# EAGLE board 555 timer board (EAGLE 9.5.0)
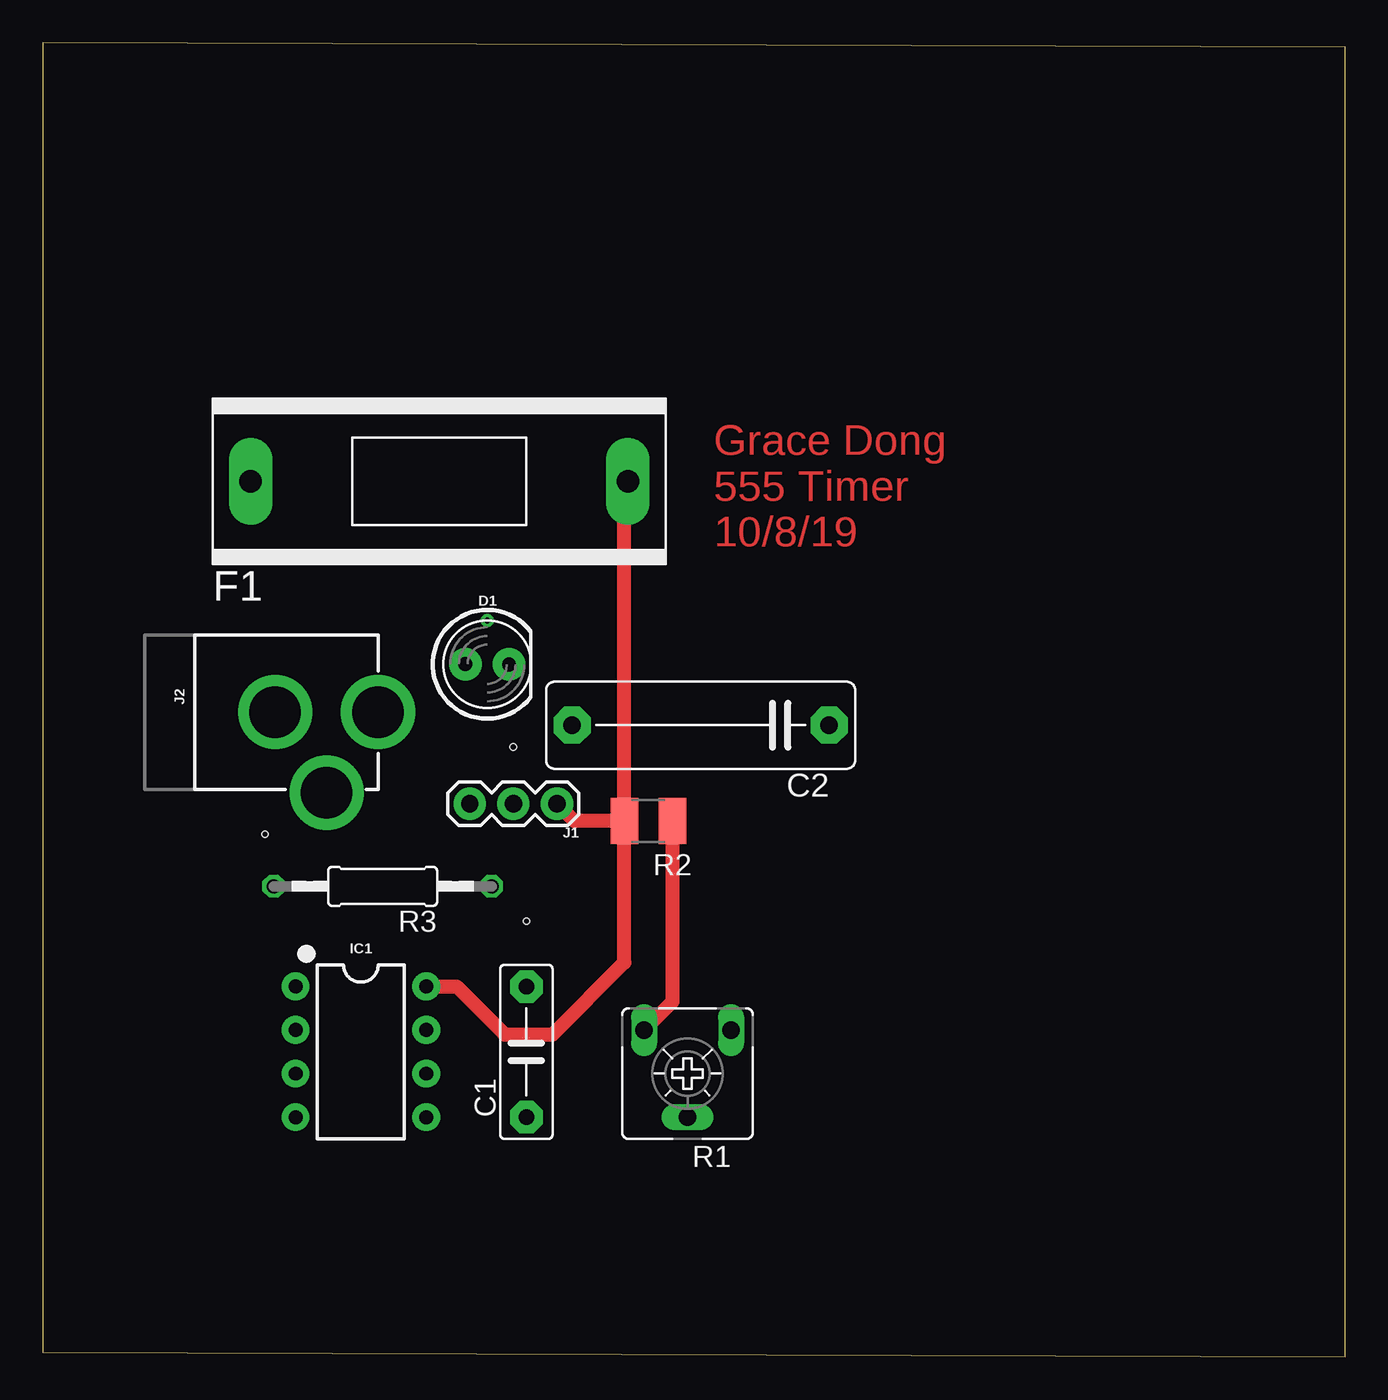
[diagram p0: board, top side]
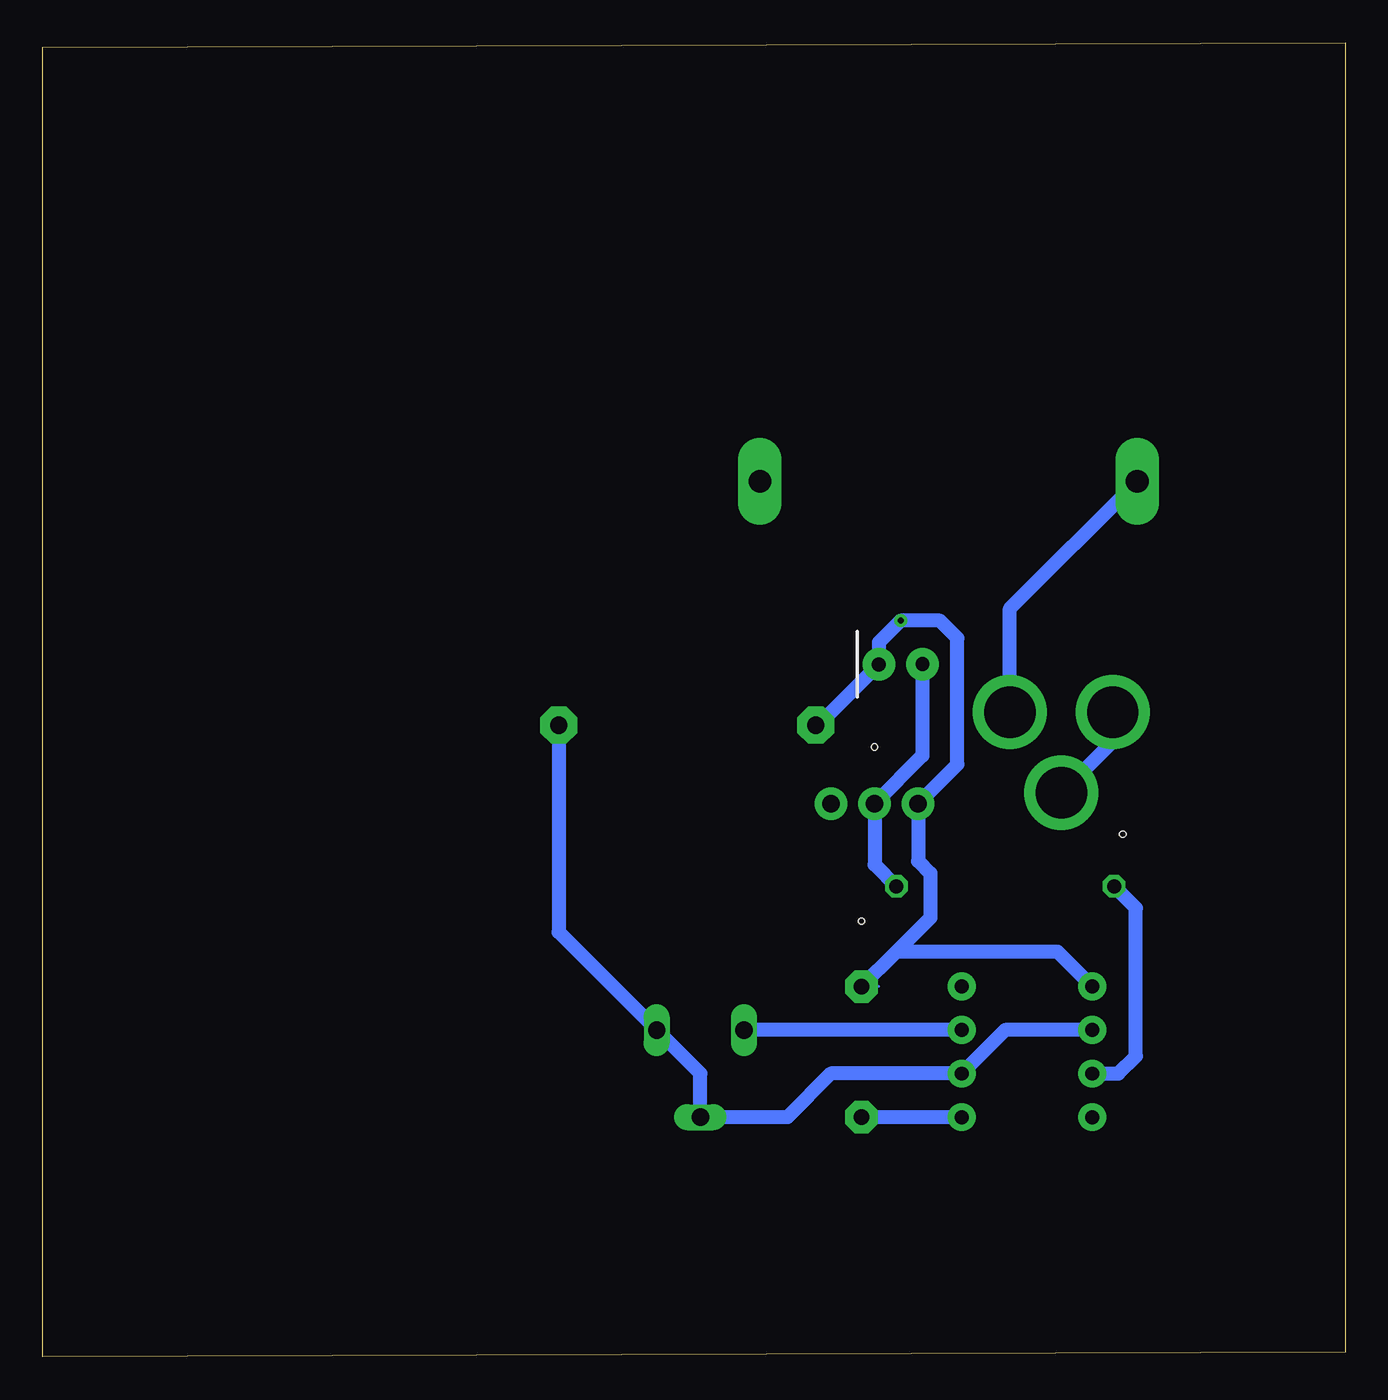
[diagram p1: board, bottom side, seen from below]

Size 75.93 x 76.63 mm. Coordinates in mm from the lower left corner, seen from the top.
Outline: 0,0.25 75.93,0 75.93,76.38 0,76.63 0,0.25
Copper layers (1*16): Top 0.035mm / dielectric 1.5mm / Bottom 0.035mm
Design rules "default": minimum track width 6mil, minimum drill 0.35mm, track to track 6mil, track to pad 6mil, pad to pad 6mil, via to via 6mil, smd to smd 6mil, copper to edge 40mil, drill to drill 6mil, minimum pad ring 10mil, minimum via ring 8mil, stop-mask expansion 4mil, vias tented up to drill 0mil, thermal gap 10mil
Holes 0.35 mm at 28.19,25.4 27.43,35.56 12.95,30.48

## Footprints (pad centres in the part's own frame; a part is rotated, then mirrored left to right if it is on the bottom)
C7.5B3 = drill 0.914 pad 1.905 octagon: 1 -3.81,0; 2 3.81,0
C15B5 = drill 1.016 pad 2.159 octagon: 1 -7.493,0; 2 7.493,0
LED_5MM = drill 0.813 pad 1.88: A -1.27,0; K 1.27,0
SH22 = drill 1.321 pad 2.54 long: 1 -10.998,0; 2 10.998,0
DIP08 = drill 0.813 pad 1.626: 1 -3.81,-3.81; 2 -1.27,-3.81; 3 1.27,-3.81; 4 3.81,-3.81; 5 3.81,3.81; 6 1.27,3.81; 7 -1.27,3.81; 8 -3.81,3.81
1X03 = drill 1.016 pad 1.88: 1 0,0; 2 2.54,0; 3 5.08,0
POWER_JACK_PTH = drill 2.997 pad 4.318: GND 0,7.7; GNDBREAK 4.7,10.7; PWR 0,13.7
CA6V = drill 1.016 long: A -2.54,-2.54; E 2.54,-2.54; S 0,2.54
R1210 = smd 1.6 x 2.7: 1 -1.4,0; 2 1.4,0
0207/12 = drill 0.813 octagon: 1 -6.35,0; 2 6.35,0

## Placement (x,y rotation side)
C1  [C7.5B3]  28.19,17.78 90 top
C2  [C15B5]  38.35,36.83 180 top
D1  [LED_5MM]  25.91,40.39 359.8 top
F1  [SH22]  23.11,51.05 0 top
IC1  555  [DIP08]  18.54,17.78 270 top
J1  [1X03]  29.97,32.26 180 top
J2  POWER_JACK  [POWER_JACK_PTH]  5.84,37.59 270 top
R1  [CA6V]  37.59,16.51 180 top
R2  [R1210]  35.31,31.24 180 top
R3  [0207/12]  19.81,27.43 180 top

## Library data of the parts
C1 C2 = capacitor-wima
D1 = SparkFun-LED
F1 = fuse; OC_FARNELL: unknown; OC_NEWARK: unknown
IC1 = SparkFun-IC-Special-Function; PROD_ID: IC-09173; PROD_ID_ALT: IC-09173
J1 = SparkFun-Connectors
J2 = SparkFun-Connectors; PROD_ID: CONN-08197
R1 = pot
R2 R3 = resistor

## Nets
GND: C1.2 C2.2 D1.K IC1.1 J1.3
N$1: F1.1 J2.PWR
N$2: J2.GND J2.GNDBREAK
N$3: C2.1 IC1.2 IC1.6 R1.A R1.S
N$4: IC1.7 R1.E R2.1
N$5: C1.1 IC1.5
N$6: D1.A J1.2 R3.1
N$7: IC1.3 R3.2
VCC: F1.2 IC1.8 J1.1 R2.2

## Tracks (layer width: path | path; a pad name or v marks a point on that pad's centre or on a via)
GND  (via drill 0.35)
  Bottom 0.152: 28.14,21.69 C1.2 27.18,21.59
  Bottom 0.813: 26.16,23.62 24.18,25.6 24.18,28.19 24.89,28.9 J1.3 22.61,34.54 22.61,41.91 23.62,42.93 v25.91,42.93 27.18,41.66 D1.K 30.73,36.83 C2.2 | IC1.1 16.76,23.62 26.16,23.62 | C1.2 26.16,23.62
N$1
  Bottom 0.813: J2.PWR 19.54,43.63 F1.1
N$2
  Bottom 0.813: J2.GNDBREAK 13.54,35.89 J2.GND
N$3
  Bottom 0.813: C2.1 45.85,24.77 R1.A 37.59,16.51 R1.S 32.51,13.97 29.97,16.51 IC1.6 19.81,19.05 IC1.2
N$4
  Top 0.813: R1.E 36.71,20.7 R2.1
  Bottom 0.813: IC1.7 R1.E
N$5
  Bottom 0.813: IC1.5 C1.1
N$6
  Bottom 0.813: D1.A 24.64,35.05 | 24.64,35.05 | 24.64,35.05 J1.2 27.43,28.7 R3.1
N$7
  Bottom 0.813: IC1.3 13.21,16.51 12.19,17.53 12.19,26.16 R3.2
VCC
  Top 0.813: R2.2 30.99,31.24 J1.1 | R2.2 33.91,50.85 F1.2 | IC1.8 24.13,21.59 26.92,18.8 29.72,18.8 33.91,22.98 R2.2

## Text on the board
Top: Grace Dong / 555 Timer / 10/8/19